# Altium PCB ESC.PcbDoc (part 3 of 3)
Units mm, origin at the board's own origin, x right, y up, seen from the top; angles counter-clockwise.
Board outline 60 x 40 mm, 4 copper layers (L1-SIGNAL/PWR, L2-GND, L3-PWR, L4-SIGNAL/PWR), stack 1.571 mm thick; 124 components, 80 nets, 417 pads, 463 vias.
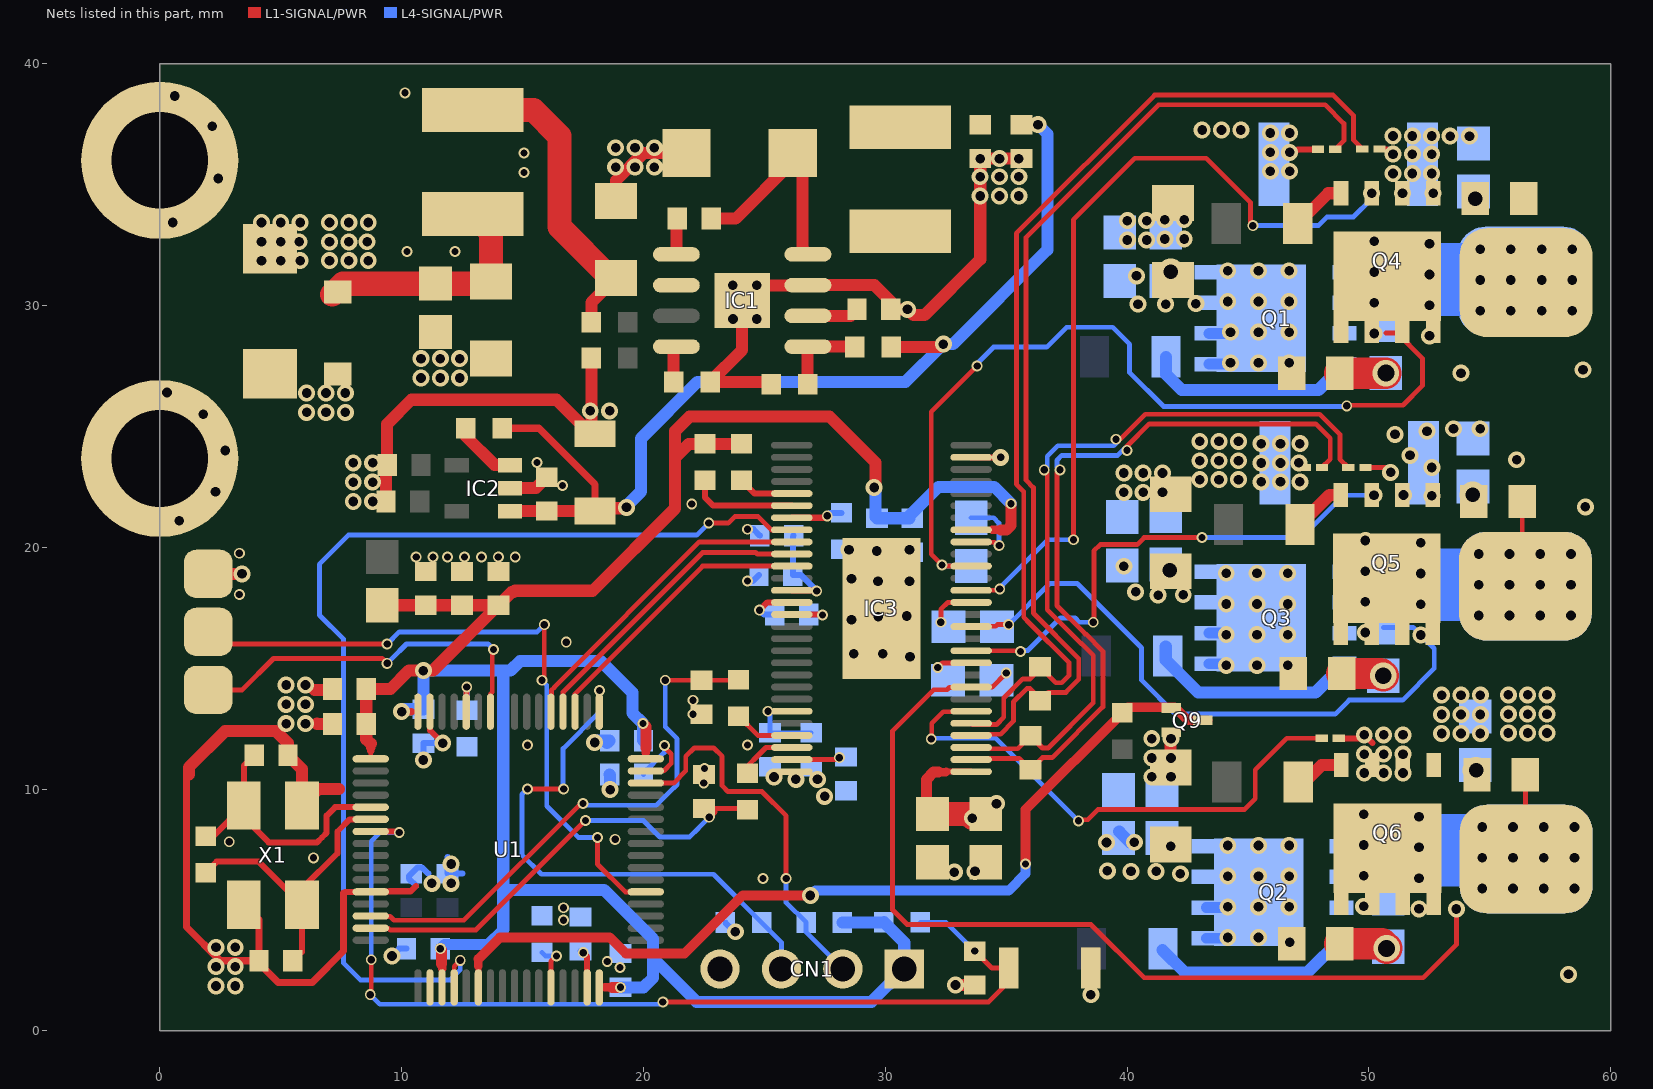
[diagram p4: the nets of this part, all layers, seen from the top]

## Via types
v1: diameter 0.7, hole 0.4, L1-SIGNAL/PWR to L4-SIGNAL/PWR, tented both sides, 336 vias
v2: diameter 0.45, hole 0.3, L1-SIGNAL/PWR to L4-SIGNAL/PWR, tented both sides, 118 vias
v3: diameter 1.1, hole 0.6, L1-SIGNAL/PWR to L4-SIGNAL/PWR, tented both sides, 5 vias
v4: diameter 1.1, hole 0.7, L1-SIGNAL/PWR to L4-SIGNAL/PWR, tented both sides, 3 vias
v5: diameter 0.7, hole 0.3, L1-SIGNAL/PWR to L4-SIGNAL/PWR, tented both sides, 1 vias

## Nets (pads, with @x,y where several pads share a name; then routed paths per layer and width w, separated by ;. In a path a pad name is that pad's centre, name@x,y a point inside that pad or via, vN(x,y) a via of type N, cw(c..) or ccw(c..) an arc to the next point about the centre after c; other vN are vias at no path point) (continued)
GND: -.1 C1.1 C2.1 C4.2 C5.1 C6.1 C7.1 C8.1 C9.1 C16.1 C19.1 C21.1 C22.1 C23.1 C24.1 C25.1 C26.1 C27.1 C30.1 C31.2 C32.1 C33.1 C34.1 C35.1 C36.1 C37.1 C38.1 C39.1 C40.1 C41.1 C42.1 C43.1 C44.1 C45.1 C46.1 C47.1 C48.1 C49.1 C50.1 C51.2 C52.1 C53.1 C54.1 C55.1 C56.1 C57.1 C58.2 CN1.4 D1.2 D2.1 D3.2 D4.2 IC1.7 IC1.9 IC2.2 IC3.28 IC3.55 IC3.57 J7.2 J10.2 J11.2 MOTOR_U4.1 Q6.1 Q6.2 Q6.3 Q9.2 R8.1 R11.2 R12.1 R20.1 R21.1 R28.2 R29.1 R31.1 R34.1 SW1.2 U1.12 U1.18 U1.63 X1.2 X1.4 | length 98.1
  L1-SIGNAL/PWR w0.25: 7.6,5.7 7.65,5.75 U1.12@8.722,5.75 8.731,5.76 9.482,5.76 9.497,5.775 10.375,5.775 10.6,6 ; U1.63@11.172,13.2 11.172,12.428 v1(11.7,11.9) ; IC3.55@33.549,23.72 v5(34.77,23.72) ; v1(38.5,1.5) SW1.2@38.5,2.6 ; v1@46.7,36.1 47.055,36.455 J10.2@47.894,36.455 ; J7.2@48.756,12.1 49.956,12.1 50.142,11.914
  L1-SIGNAL/PWR w0.3: 1.2,10.6 1.1,10.6 1.1,4.3 2.5,2.9 C58.2@4.1,2.9 ; X1.4@3.472,5.224 4.1,4.596 C58.2@4.1,2.9 ; 7.6,5.7 7.6,3.3 6.3,2 4.9,2 4.1,2.8 C58.2@4.1,2.9
  L1-SIGNAL/PWR w0.5: 1.2,10.6 1.2,10.9 2.7,12.4 4.8,12.4 5.3,11.9 C57.1@5.3,11.4 5.872,10.828 X1.2@5.872,9.324 6.548,10 7.4,10 ; MOTOR_U4.1@2,18.9 v1(3.4,18.9) ; 6.4,14.1 7.104,14.1 C42.1@7.138,14.134 ; 6.5,12.7 6.511,12.689 C43.1@7.142,12.689 ; C23.1@9.35,21.89 9.35,23.35 C24.1@9.4,23.4 9.4,25.1 10.4,26.1 16.4,26.1 17.8,24.7 17.842,24.742 R29.1@17.842,27.825 ; IC2.2@14.476,22.448 15.549,22.448 C22.1@16,22.9 ; C4.2@18.86,34.324 18.86,35.16 20.005,36.305 D1.2@21.779,36.305 ; v1(24.68,30.829) 24.08,30.229 24.08,28.156 R8.1@22.753,26.83 25.187,26.83 R11.2@25.277,26.74 ; IC1.9@24.704,30.829 26.789,30.829 IC1.7@26.8,30.84 29.55,30.84 30.23,30.16 C9.1@30.23,29.84 v1(30.92,29.84) 31.16,29.6 31.62,29.6 33.927,31.907 33.927,35.373 33.9,35.4 33.927,35.427 C7.1@33.927,36.077 C6.1@35.627,36.077 ; v1(32.9,1.9) C51.2@33.7,1.9 ; C52.1@41.8,10.893 v1@41.8,12.1
  L4-SIGNAL/PWR w0.25: v1(9.6,3.1) 9.9,3.4 C45.1@10.2,3.4 ; 10.6,6 10.3,6.3 10.3,6.4 10.65,6.75 10.85,6.75 11.1,6.5 ; v1(10.9,11.2) C47.1@10.9,11.9 v1(11.7,11.9) ; v1@11.9,7.2 C53.1@11.9,6.5 12.425,6.5 12.525,6.5 ; R34.1@23.387,4.479 23.765,4.1 v1(23.8,4.1) ; v2(24.3,18.6) 24.522,18.6 C41.1@24.78,18.857 ; v2(24.3,20.745) 24.549,20.745 C16.1@24.813,20.48
  L4-SIGNAL/PWR w0.5: v1(17.979,11.927) 18,11.948 18,12 C44.1@18.6,12 C44.1@18.5,11.9 ; C56.1@18.6,10.6 18.611,10.589 18.611,9.989 v1(18.621,9.979)
  other v1: 2.32,1.855 3.12,1.855 58.25,2.34 2.32,2.655 3.12,2.655 2.32,3.455 3.12,3.455 11.247,6.104 12.047,6.104 32.853,6.567 33.708,6.6 12.047,6.904 27.49,9.7 26.3,10.4 27.2,10.4 25.4,10.5 41.017,10.504 41.817,10.504 49.806,10.663 50.606,10.663 51.406,10.663 41.017,11.286 41.817,11.286 49.806,11.444 50.606,11.444 51.406,11.444 41.017,12.086 41.817,12.086 49.806,12.244 50.606,12.244 51.406,12.244 53.006,12.3 53.806,12.3 54.606,12.3 55.764,12.317 56.564,12.317 57.364,12.317 5.224,12.705 6.024,12.705 53.006,13.082 53.806,13.082 54.606,13.082 55.764,13.099 56.564,13.099 57.364,13.099 5.224,13.505 6.024,13.505 53.006,13.882 53.806,13.882 54.606,13.882 55.764,13.899 56.564,13.899 57.364,13.899 5.224,14.305 6.024,14.305 31.02,15.479 28.7,15.6 29.9,15.6 28.6,17 29.703,17.12 30.888,17.159 29.7,18.6 31,18.6 28.6,18.7 29.653,19.849 28.5,19.9 31,19.9 0.8,21.1 58.95,21.67 8,21.89 8.8,21.89 39.862,22.269 40.662,22.269 41.462,22.269 2.3,22.3 8,22.69 8.8,22.69 45.543,22.703 46.343,22.703 47.143,22.703 43.002,22.796 43.802,22.796 44.602,22.796 39.862,23.069 40.662,23.069 41.462,23.069 8,23.49 8.8,23.49 45.543,23.485 46.343,23.485 47.101,23.488 43.002,23.578 43.802,23.578 44.602,23.578 56.11,23.62 2.7,24 45.543,24.285 46.343,24.285 47.143,24.285 43.002,24.378 43.802,24.378 44.602,24.378 1.8,25.5 6.07,25.58 6.87,25.58 7.67,25.58 17.8,25.64 18.6,25.64 6.07,26.38 6.87,26.38 7.67,26.38 0.3,26.4 10.8,27 11.6,27 12.4,27 53.805,27.2 58.85,27.34 10.8,27.8 11.6,27.8 12.4,27.8 23.7,29.44 24.68,29.44 23.69,30.829 40.007,32.707 40.807,32.707 41.562,32.746 42.362,32.746 40.007,33.507 40.807,33.507 41.562,33.546 42.362,33.546 33.924,34.522 34.724,34.522 35.524,34.522 33.924,35.322 34.724,35.322 35.524,35.322 45.922,35.548 46.722,35.548 18.85,35.72 19.65,35.72 20.45,35.72 33.924,36.069 34.724,36.069 35.524,36.069 45.922,36.33 46.722,36.33 18.85,36.52 19.65,36.52 20.45,36.52 45.922,37.13 46.722,37.13 43.105,37.255 43.905,37.255 44.705,37.255
  other v2: 19.025,2.625 18.502,2.872 16.69,4.581 16.69,5.094 24.938,6.3 6.352,7.156 2.873,7.822 18.828,7.922 22.494,10.25 22.525,10.851 15.2,11.815 24.3,11.826 22.05,13.093 22.05,13.675 16.808,16.075 3.288,18.05 10.6,19.6 11.3,19.6 11.9,19.6 12.6,19.6 13.3,19.6 14,19.6 14.7,19.6 3.288,19.75 21.995,21.79 16.65,22.55 15.6,23.5 10.225,32.23 12.205,32.23 15.064,35.5 15.064,36.305 10.14,38.79
JTCK/SWCLK: CN1.3 R34.2 U1.49 | length 23.2
  L1-SIGNAL/PWR w0.2: v2(15.2,10) v2(16.7,10) ; U1.49@18.172,13.2 18.172,14.072 v2(18.177,14.075) v2(18.177,14.075) v2@18.177,14.077
  L4-SIGNAL/PWR w0.2: v2(15.2,10) 14.975,9.775 14.975,7.283 15.783,6.475 22.897,6.475 R34.2@24.893,4.479 25.704,3.668 CN1.3@25.704,2.561 ; v2@16.675,10 16.675,11.675 18.172,13.172 18.172,14.07 v2(18.177,14.075)
JTMS/SWDIO: CN1.2 R32.1 U1.46 | length 15.9
  L1-SIGNAL/PWR w0.2: U1.46@20.098,10.25 21.25,10.25 21.75,10.75 21.75,11.35 22.1,11.7 22.9,11.7 23.25,11.35 23.25,10.144 23.494,9.9 24.9,9.9 25.9,8.9 v2(25.9,6.3)
  L4-SIGNAL/PWR w0.2: v2(25.9,6.3) 25.9,5.308 R32.1@26.722,4.486 26.722,4.083 CN1.2@28.244,2.561
NetC3_1: C3.1 D1.1 IC1.8 L2.1 | length 9.2
  L1-SIGNAL/PWR w0.5: C3.1@22.8,33.59 23.81,33.59 26.18,35.96 D1.1@26.18,36.305 26.18,35.849 26.58,35.449 26.58,32.33 IC1.8@26.8,32.11
NetC3_2: C3.2 IC1.1 | length 1.5
  L1-SIGNAL/PWR w0.5: IC1.1@21.359,32.11 21.359,33.549 C3.2@21.4,33.59
NetC9_2: C9.2 IC1.6 | length 2.1
  L1-SIGNAL/PWR w0.5: IC1.6@26.8,29.57 28.56,29.57 C9.2@28.83,29.84
NetC10_2: C10.2 R1.1 | length 1.9
  L1-SIGNAL/PWR w1.3: R1.1@48.8,27.2 v4(50.7,27.2)
NetC11_2: C11.2 R2.1 | length 1.8
  L1-SIGNAL/PWR w1.3: R2.1@48.87,14.78 50.497,14.78 v4(50.591,14.685)
NetC12_2: C12.2 R3.1 | length 2
  L1-SIGNAL/PWR w1.3: R3.1@48.8,3.6 50.54,3.6 v4(50.73,3.41)
NetC13_1: C13.1 IC3.48 | length 3.4
  L1-SIGNAL/PWR w0.2: IC3.48@33.549,20.22 33.565,20.204 34.509,20.204 34.639,20.074 v2(34.707,20.074)
  L4-SIGNAL/PWR w0.2: C13.1@33.549,21.22 34.48,21.22 34.7,21 34.7,20.081 v2(34.707,20.074)
NetC14_1: C14.1 IC3.15 | length 1.8
  L1-SIGNAL/PWR w0.25: IC3.15@26.134,17.22 27.38,17.22 v2(27.4,17.2)
  L4-SIGNAL/PWR w0.25: C14.1@26.834,17.219 27.381,17.219 v2(27.4,17.2)
NetC14_2: C14.2 IC3.14 | length 2.2
  L1-SIGNAL/PWR w0.25: v2(24.8,17.4) 25.12,17.72 IC3.14@26.134,17.72
  L4-SIGNAL/PWR w0.25: v2(24.8,17.4) 24.981,17.219 C14.2@25.435,17.219
NetC15_1: C15.1 IC3.43 | length 1.9
  L1-SIGNAL/PWR w0.2: v2(32.297,16.901) 32.3,16.901 32.3,17.428 32.592,17.72 IC3.43@33.549,17.72
NetC16_2: C16.2 C41.2 IC3.13 | length 4
  L1-SIGNAL/PWR w0.25: IC3.13@26.134,18.22 26.98,18.22 27.015,18.185 27.044,18.185 27.098,18.131 v2(27.161,18.193)
  L4-SIGNAL/PWR w0.25: C16.2@26.213,20.48 26.179,20.447 C41.2@26.179,18.857 26.496,18.857 v2(27.161,18.193)
NetC17_2: C17.2 R16.1
  other v3: 54.401,34.419
NetC18_2: C18.2 R17.1
  other v3: 54.288,22.162
NetC19_2: C19.2 R18.1
  other v3: 54.429,10.775
NetC20_1: C20.1 IC3.38 | length 1.5
  L1-SIGNAL/PWR w0.2: v2(32.168,15.029) 32.358,15.22 IC3.38@33.549,15.22
NetC30_2: C30.2 C48.2 IC3.23 | length 3.6
  L1-SIGNAL/PWR w0.2: v2(25.154,13.22) IC3.23@26.134,13.22
  L4-SIGNAL/PWR w0.2: v2(25.154,13.22) 25.18,13.22 25.237,13.163 C30.2@25.237,12.33 C48.2@26.939,12.33
NetC31_1: C31.1 IC3.27 | length 2.1
  L1-SIGNAL/PWR w0.2: IC3.27@26.134,11.22 28.021,11.22 v2@28.192,11.39
  other v2: 28.1,11.3
NetC55_2: C55.2 U1.31 | length 1.6
  L1-SIGNAL/PWR w0.25: v2(17.511,3.235) 17.672,3.075 U1.31@17.672,1.8
  L4-SIGNAL/PWR w0.25: C55.2@17.4,3.314 17.433,3.314 v2(17.511,3.235)
NetC56_2: C56.2 U1.47 | length 3.6
  L1-SIGNAL/PWR w0.2: U1.47@20.098,10.75 20.117,10.769 20.854,10.769 21.148,11.064 21.148,11.45 20.865,11.733 20.886,11.754 20.886,11.793 20.88,11.8 v2(20.865,11.8)
  L4-SIGNAL/PWR w0.2: C56.2@20,10.6 20,10.65 20.865,11.516 20.865,11.733 20.865,11.772 20.879,11.786 v2(20.865,11.8)
NetIC1_4: IC1.4 R8.2 | length 1.5
  L1-SIGNAL/PWR w0.5: R8.2@21.247,26.83 21.247,28.188 IC1.4@21.359,28.3
NetIC1_5: IC1.5 R4.1 R11.1 | length 3.5
  L1-SIGNAL/PWR w0.5: R11.1@26.783,26.74 26.783,28.283 IC1.5@26.8,28.3 28.727,28.3 R4.1@28.747,28.28
NetIC2_3: IC2.3 R19.1 | length 2.6
  L1-SIGNAL/PWR w0.5: R19.1@12.657,24.92 12.657,24.586 13.845,23.398 IC2.3@14.476,23.398
NetIC3_5: IC3.5 R10.2 | length 2.3
  L1-SIGNAL/PWR w0.25: R10.2@24.049,22.766 24.596,22.22 IC3.5@26.134,22.22
NetIC3_6: IC3.6 R9.1 | length 4.4
  L1-SIGNAL/PWR w0.25: R9.1@22.549,22.766 22.549,22.051 22.88,21.72 IC3.6@26.134,21.72
NetIC3_7: IC3.7 R12.2 | length 2.1
  L1-SIGNAL/PWR w0.25: IC3.7@26.134,21.22 27.52,21.22 v2(27.6,21.3)
  L4-SIGNAL/PWR w0.25: v2(27.6,21.3) 27.725,21.425 R12.2@28.192,21.425
NetIC3_25: IC3.25 R22.1 | length 2.5
  L1-SIGNAL/PWR w0.2: R22.1@23.931,13.021 24.732,12.22 IC3.25@26.134,12.22
NetIC3_26: IC3.26 R23.1 | length 2.6
  L1-SIGNAL/PWR w0.2: R23.1@24,10.653 25.066,11.72 IC3.26@26.134,11.72
NetQ1_4: Q1.4 R5.2 | length 8.8
  L4-SIGNAL/PWR w0.5: R5.2@41.609,27.876 41.609,27.151 42.26,26.5 47.912,26.5 Q1.4@48.983,27.571
NetQ2_4: Q2.4 R7.2 | length 8.4
  L4-SIGNAL/PWR w0.5: R7.2@41.458,3.342 42.38,2.42 47.46,2.42 Q2.4@48.87,3.83
NetQ3_4: Q3.4 R6.2 | length 9
  L4-SIGNAL/PWR w0.5: R6.2@41.596,15.9 41.596,15.336 42.582,14.35 42.942,13.99 47.793,13.99 Q3.4@48.984,15.181
NetQ4_4: Q4.4 R13.2 | length 2.3
  L1-SIGNAL/PWR w0.5: R13.2@47.058,33.381 48.315,34.638 Q4.4@48.844,34.638
NetQ5_4: Q5.4 R14.2 | length 2.2
  L1-SIGNAL/PWR w0.5: R14.2@47.147,20.938 48.369,22.16 Q5.4@48.838,22.16
NetQ6_4: Q6.4 R15.2 | length 2.1
  L1-SIGNAL/PWR w0.5: R15.2@47.079,10.3 47.352,10.3 48.042,10.99 Q6.4@48.864,10.99
NetR28_1: R28.1 U1.28 | length 2.1
  L1-SIGNAL/PWR w0.2: U1.28@16.172,1.8 16.172,2.872 v2(16.4,3.1)
  L4-SIGNAL/PWR w0.2: R28.1@15.8,3.247 15.947,3.1 v2(16.4,3.1)
NetR31_2: R31.2 U1.60 | length 2
  L1-SIGNAL/PWR w0.25: U1.60@12.672,13.2 12.681,13.21 12.681,14.215 v2(12.691,14.225)
  L4-SIGNAL/PWR w0.25: v2(12.691,14.225) 12.691,13.262 R31.2@12.7,13.253
nSCS: IC3.8 U1.20 | length 44.4
  L1-SIGNAL/PWR w0.2: U1.20@12.172,1.8 12.172,2.667 v2(12.424,2.919) ; v2(22.7,21) 23.508,21 23.777,21.27 24.74,21.27 25.29,20.72 IC3.8@26.134,20.72
  L4-SIGNAL/PWR w0.2: v2(12.424,2.919) 12.424,2.524 12,2.1 8.3,2.1 7.6,2.8 7.6,16.2 6.6,17.2 6.6,19.3 7.8,20.5 22.2,20.5 v2(22.7,21)
OSC_IN: C57.2 R30.2 U1.5 X1.3 | length 11.5
  L1-SIGNAL/PWR w0.25: R30.2@1.9,8.053 2.202,8.053 X1.3@3.472,9.324 ; C57.2@3.9,11.4 3.472,10.972 X1.3@3.472,9.324 ; U1.5@8.722,9.25 7.25,9.25 6.897,8.897 6.897,8.189 6.707,7.999 6.508,7.8 4.5,7.8 3.472,8.828 X1.3@3.472,9.324
OSC_OUT: C58.1 R30.1 U1.6 X1.1 | length 12.6
  L1-SIGNAL/PWR w0.25: R30.1@1.9,6.547 2.353,7 4.096,7 X1.1@5.872,5.224 ; C58.1@5.5,2.9 5.872,3.272 X1.1@5.872,5.224 ; U1.6@8.722,8.75 7.85,8.75 7.347,8.247 7.347,7.347 5.872,5.872 X1.1@5.872,5.224
POWER_BUCK: C4.1 IC1.2 L1.2 R26.2 | length 13.3
  L1-SIGNAL/PWR w0.5: R26.2@17.842,29.305 17.842,30.122 C4.1@18.86,31.139
  L1-SIGNAL/PWR w1: L1.2@12.936,38.081 15.449,38.081 16.53,37 16.53,33.25 18.641,31.139 C4.1@18.86,31.139
POWER_IN: +.1 C5.2 C8.2 C21.2 C34.2 C35.2 C36.2 C37.2 C38.2 C39.2 C40.2 C49.2 C50.2 C52.2 D2.2 D3.1 IC3.29 L1.1 Q1.5 Q1.6 Q1.7 Q1.8 Q1.9 Q2.5 Q2.6 Q2.7 Q2.8 Q2.9 Q3.5 Q3.6 Q3.7 Q3.8 Q3.9 R1.2 R2.2 R3.2 | length 21.9
  L1-SIGNAL/PWR w0.25: 32.52,10.72 IC3.29@33.549,10.72
  L1-SIGNAL/PWR w0.35: 32.2,10.7 32.5,10.7 32.52,10.72
  L1-SIGNAL/PWR w0.45: C35.2@31.95,8.975 31.7,9.225 31.7,10.4 32,10.7 32.2,10.7
  L1-SIGNAL/PWR w1: D3.1@7.13,30.45 7.58,30.9 C5.2@11.4,30.9 13.612,30.9 C8.2@13.7,30.988 13.7,33.017 L1.1@12.936,33.781 ; C35.2@31.95,8.975 33.425,8.975 v1(33.6,8.8) ; C34.2@33.8,8.8 33.975,8.975 C34.2@34.15,8.975
  L4-SIGNAL/PWR w0.45: C37.2@41.478,7.97 v1(41.806,7.642) ; Q2.5@43.27,3.83 44.13,3.83 v1(44.16,3.86) ; Q2.6@43.27,5.1 44.13,5.1 v1(44.16,5.13) ; Q1.5@43.383,27.571 44.222,27.571 v1(44.274,27.624) ; Q1.6@43.383,28.841 44.222,28.841 v1(44.274,28.894) ; Q3.5@43.384,15.181 44.033,15.181 v1(44.099,15.115) ; Q3.6@43.384,16.451 44.033,16.451 v1(44.099,16.385)
  L4-SIGNAL/PWR w0.5: C38.2@39.674,8.241 40.115,7.8 v1(40.3,7.8)
  other v1: 46.722,3.672 45.43,3.86 45.43,5.13 46.7,5.13 44.16,6.4 45.43,6.4 46.7,6.4 42.2,6.5 40.159,6.6 41.2,6.6 39.18,6.62 44.16,7.67 45.43,7.67 46.7,7.67 39.15,7.788 34.6,9.4 45.369,15.115 46.639,15.115 45.369,16.385 46.639,16.385 44.099,17.655 45.369,17.655 46.639,17.655 41.283,18.022 42.321,18.035 40.353,18.156 44.099,18.925 45.369,18.925 46.639,18.925 39.864,19.215 45.432,27.624 46.702,27.624 45.432,28.894 46.702,28.894 40.451,30.053 41.596,30.053 42.84,30.075 44.162,30.164 45.432,30.164 46.702,30.164 40.385,31.222 44.162,31.434 45.432,31.434 46.702,31.434 4.202,31.85 5.002,31.85 5.802,31.85 7.018,31.85 7.818,31.85 8.618,31.85 4.202,32.631 5.002,32.631 5.76,32.635 7.018,32.631 7.818,32.631 8.576,32.635 0.54,33.43 4.202,33.431 5.002,33.431 5.802,33.431 7.018,33.431 7.818,33.431 8.618,33.431 2.41,35.25 2.17,37.41 0.62,38.66
  other v3: 41.764,19.046 41.8,31.4
PWM/DSHOT: MOTOR_U3.1 U1.37 | length 28.3
  L1-SIGNAL/PWR w0.2: MOTOR_U3.1@2,16.5 2.5,16 v2(9.4,16) ; v2(15.8,14.5) 15.9,14.6 v2(15.9,16.8) ; v2(18.1,8) 18.1,6.9 19.25,5.75 U1.37@20.098,5.75
  L4-SIGNAL/PWR w0.2: v2(9.4,16) 9.9,16.5 15.6,16.5 v2(15.9,16.8) ; v2(15.8,14.5) 16,14.3 16,9.3 17.3,8 17.6,8 v2(18.1,8)
RESET: C51.1 R27.1 SW1.1 U1.7 | length 40.8
  L1-SIGNAL/PWR w0.2: v2(8.7,1.5) 8.741,1.541 v2(8.741,2.941) ; v2(20.8,1.2) 33.7,1.2 34.274,1.2 35.1,2.026 SW1.1@35.1,2.6 34.4,2.6 v2(33.7,3.3)
  L1-SIGNAL/PWR w0.25: U1.7@8.722,8.25 9.85,8.25 v2(9.9,8.2)
  L4-SIGNAL/PWR w0.2: v2(8.7,1.5) 9.1,1.1 20.7,1.1 v2(20.8,1.2) ; v2(8.741,2.941) 8.741,7.841 9.1,8.2 v2(9.9,8.2) ; R27.1@31.452,4.493 32.507,4.493 v2(33.7,3.3)
S1_N: C28.2 IC3.33 J8.1 | length 43.4
  L1-SIGNAL/PWR w0.2: IC3.33@33.549,12.72 33.599,12.67 34.6,12.67 34.9,12.97 34.9,13.766 35.689,14.555 35.989,14.555 36.4,14.966 C28.2@36.4,15.055 37.055,14.4 37.3,14.4 37.6,14.7 37.6,15.23 35.962,16.869 35.725,17.105 35.725,22.3 35.42,22.605 35.42,32.986 41.134,38.7 48.519,38.7 49.367,37.852 49.367,36.832 J8.1@49.729,36.47
S1_P: C28.1 IC3.32 J10.1 | length 42.5
  L1-SIGNAL/PWR w0.2: IC3.32@33.549,12.22 33.599,12.27 34.766,12.27 35.3,12.804 35.3,13.6 35.855,14.155 35.989,14.155 36.4,13.744 C28.1@36.4,13.655 36.745,14 37.466,14 38,14.534 38,15.396 36.127,17.269 36.125,17.271 36.125,22.466 35.82,22.771 35.82,32.82 41.3,38.3 48.187,38.3 48.967,37.52 48.967,36.817 J10.1@48.605,36.455
S2_N: C29.2 IC3.31 J9.1 | length 32.2
  L1-SIGNAL/PWR w0.2: IC3.31@33.549,11.72 33.599,11.67 35.47,11.67 C29.2@36,12.2 36.5,11.7 36.734,11.7 38.6,13.566 38.6,15.534 38.117,16.017 38.096,16.017 36.7,17.413 36.7,23.075 v2(36.575,23.2) ; v2(39.537,24.466) 39.713,24.466 40.747,25.5 47.966,25.5 48.8,24.666 48.8,23.644 J9.1@49.144,23.3
  L4-SIGNAL/PWR w0.2: v2(36.575,23.2) 36.7,23.325 36.7,23.766 37.134,24.2 39.447,24.2 39.625,24.378 v2(39.537,24.466)
S2_P: C29.1 IC3.30 J11.1 | length 31.5
  L1-SIGNAL/PWR w0.2: IC3.30@33.549,11.22 33.599,11.27 35.531,11.27 C29.1@36,10.8 36.5,11.3 36.9,11.3 39,13.4 39,15.7 38.283,16.417 38.262,16.417 37.1,17.579 37.1,23.075 v2(37.225,23.2) ; v2(39.996,24.007) 39.996,24.184 40.913,25.1 47.8,25.1 48.4,24.5 48.4,23.644 J11.1@48.056,23.3
  L4-SIGNAL/PWR w0.2: v2(37.225,23.2) 37.1,23.325 37.1,23.6 37.3,23.8 39.613,23.8 39.908,24.095 v2(39.996,24.007)
SCLK: IC3.11 U1.51 | length 11.9
  L1-SIGNAL/PWR w0.2: U1.51@17.172,13.2 17.172,13.945 22.446,19.22 24.643,19.22 IC3.11@26.134,19.22
SDI: IC3.9 U1.53 | length 13.4
  L1-SIGNAL/PWR w0.2: U1.53@16.172,13.2 16.191,13.219 16.191,14.085 16.325,14.219 16.325,14.23 22.315,20.22 24.562,20.22 IC3.9@26.134,20.22
SDO: IC3.10 U1.52 | length 12.7
  L1-SIGNAL/PWR w0.2: U1.52@16.672,13.2 16.672,14.011 22.443,19.782 24.646,19.782 24.708,19.72 IC3.10@26.134,19.72
SH_A: C10.1 C13.2 IC3.46 MOTOR_U1.1 pad.1@56.435,31.007 Q1.1 Q1.2 Q1.3 Q4.5 Q4.6 Q4.7 Q4.8 Q4.9 R16.2 | length 42.5
  L1-SIGNAL/PWR w0.2: IC3.46@33.549,19.22 32.39,19.22 31.9,19.71 31.9,25.6 v2(33.8,27.5) ; v2(49.08,25.848) 49.106,25.875 51.408,25.875 52.213,26.68 52.213,27.811 51.164,28.86 50.7,28.86
  L4-SIGNAL/PWR w0.2: v2(32.342,19.268) 32.39,19.22 C13.2@33.549,19.22 ; v2(33.8,27.5) 33.8,27.6 34.476,28.276 36.676,28.276 37.5,29.1 39.4,29.1 40.105,28.395 40.105,27.225 41.504,25.825 v2@49.075,25.825 ; 47.849,25.825 v2@49.075,25.825 ; v2@49.1,25.8 v2@49.075,25.825
  L4-SIGNAL/PWR w3: 51.492,31.072 56.37,31.072 pad.1@56.435,31.007
  other v1: 52.505,28.742 50.214,28.842 54.6,29.784 55.87,29.784 57.14,29.784 58.41,29.784 52.505,30.012 50.214,30.112 54.6,31.054 55.87,31.054 57.14,31.054 58.41,31.054 52.505,31.282 50.214,31.382 54.6,32.324 55.87,32.324 57.14,32.324 58.41,32.324 52.505,32.552 50.214,32.652
SH_B: C11.1 C15.2 IC3.41 MOTOR_V1.1 pad.1@56.468,18.391 Q3.1 Q3.2 Q3.3 Q5.5 Q5.6 Q5.7 Q5.8 Q5.9 R17.2 | length 34.3
  L1-SIGNAL/PWR w0.2: IC3.41@33.549,16.72 33.565,16.735 34.567,16.735 34.632,16.8 v2(35.1,16.8) ; v1(55.813,19.721) 56.341,20.249 R17.2@56.341,21.895
  L4-SIGNAL/PWR w0.2: v2(35.1,16.8) 36.8,18.5 37.934,18.5 40.6,15.834 40.6,14.5 42,13.1 48.6,13.1 49.18,13.68 51.391,13.68 52.7,14.99 52.7,15.813 51.828,16.685 C11.1@50.591,16.685
  L4-SIGNAL/PWR w3: 51.695,18.459 pad.1@56.573,18.459
  other v1: 52.141,16.372 49.85,16.472 54.543,17.181 55.813,17.181 57.083,17.181 58.353,17.181 52.141,17.642 49.85,17.742 54.543,18.451 55.813,18.451 57.083,18.451 58.353,18.451 52.141,18.912 49.85,19.012 54.543,19.721 57.083,19.721 58.353,19.721 52.141,20.182 49.85,20.282
SH_C: C12.1 C20.2 IC3.36 MOTOR_W1.1 pad.1@56.499,7.11 Q2.1 Q2.2 Q2.3 Q6.5 Q6.6 Q6.7 Q6.8 Q6.9 R18.2 | length 46.9
  L1-SIGNAL/PWR w0.2: v2(35,14.8) 34.42,14.22 IC3.36@33.549,14.22 33.534,14.204 32.651,14.204 32.551,14.104 31.997,14.104 30.3,12.408 30.3,5 30.9,4.4 38.5,4.4 40.7,2.2 52.248,2.2 53.615,3.566 v1(53.615,5.044) ; v1(55.958,8.432) 56.467,8.941 R18.2@56.467,10.589
  L4-SIGNAL/PWR w3: v1@51.808,7.472 pad.1@56.686,7.472
  other v1: 52.072,5.048 49.78,5.148 54.688,5.892 55.958,5.892 57.228,5.892 58.498,5.892 52.072,6.318 49.78,6.418 54.688,7.162 55.958,7.162 57.228,7.162 58.498,7.162 52.072,7.588 49.78,7.688 54.688,8.432 57.228,8.432 58.498,8.432 52.072,8.858 49.78,8.958
SL_A: C17.1 IC3.44 J8.2 Q4.1 Q4.2 Q4.3 R20.2 | length 34.8
  L1-SIGNAL/PWR w0.2: IC3.44@33.549,18.22 34.734,18.22 v2(34.734,18.272) ; v2(37.78,20.313) 37.78,33.546 40.324,36.09 43.27,36.09 45.1,34.26 45.1,33.4 v2(45.2,33.3) ; J8.2@50.44,36.47 50.781,36.47 v1(50.995,36.256)
  L4-SIGNAL/PWR w0.2: v2(34.734,18.272) 34.833,18.272 34.833,18.433 36.713,20.313 v2(37.78,20.313) ; v2(45.2,33.3) 47.911,33.3 48.271,33.66 49.36,33.66 50.114,34.414 v1(50.114,34.638)
  other v1: 51.384,34.638 52.654,34.638 50.995,35.456 51.795,35.456 52.595,35.456 51.795,36.256 52.595,36.256 50.995,37.003 51.795,37.003 52.595,37.003 53.36,37 54.16,37
SL_B: C18.1 IC3.39 J9.2 Q5.1 Q5.2 Q5.3 R21.2 | length 22.3
  L1-SIGNAL/PWR w0.2: IC3.39@33.549,15.72 35.562,15.72 v2(35.594,15.688) ; v2(38.6,16.9) 38.625,16.925 38.625,19.849 38.888,20.113 40.413,20.113 40.7,20.4 v2(43.1,20.4) ; J9.2@49.856,23.3 50.7,23.3 v1(50.9,23.1)
  L4-SIGNAL/PWR w0.2: v2(35.594,15.688) 35.642,15.735 35.902,15.735 37.241,17.075 37.854,17.075 38.029,16.9 v2(38.6,16.9) ; v2(43.1,20.4) 47.2,20.4 48.953,22.153 v1(50.209,22.153)
  other v1: 52.602,22.123 51.427,22.16 52.6,23.3 51.7,23.8 51.075,24.671 52.4,24.8 53.5,24.9 54.6,24.9
SL_C: IC3.34 J7.1 | length 22.2
  L1-SIGNAL/PWR w0.2: v2(31.9,12.075) 31.922,12.097 31.922,12.722 32.4,13.2 33.53,13.2 IC3.34@33.549,13.22 ; v2(37.986,8.686) 38.034,8.734 38.376,8.734 38.792,9.149 44.849,9.149 44.9,9.2 ; 44.9,9.2 45.3,9.6 45.3,10.8 46.6,12.1 J7.1@48.044,12.1
  L4-SIGNAL/PWR w0.2: v2(31.9,12.075) 31.925,12.1 34.572,12.1 37.672,9 v2(37.986,8.686)
SO1: C32.2 R22.2 U1.14 | length 22.7
  L1-SIGNAL/PWR w0.2: U1.14@8.722,4.75 8.741,4.731 9.527,4.731 9.683,4.575 12.575,4.575 17.4,9.4 v2(17.5,9.4) ; v2(20.9,14.5) 23.903,14.5 R22.2@23.931,14.527
  L4-SIGNAL/PWR w0.2: v2(17.5,9.4) 17.571,9.329 20.529,9.329 21.066,9.866 21.39,10.19 21.39,12.081 20.9,12.572 v2(20.9,14.5)
SO2: C33.2 R23.2 U1.15 | length 18.5
  L1-SIGNAL/PWR w0.2: U1.15@8.722,4.25 8.741,4.231 9.461,4.231 9.492,4.2 9.508,4.2 9.533,4.175 13.075,4.175 v2(17.6,8.7) ; C33.2@22.5,9.2 23,9.2 23.947,9.2 R23.2@24,9.147 ; v2(22.717,8.837) 22.75,8.837 22.963,9.05 22.963,9.2
  L4-SIGNAL/PWR w0.2: v2(17.6,8.7) 19.997,8.7 20.685,8.012 21.901,8.012 22.28,8.39 22.28,8.395 22.717,8.832 v2(22.717,8.837)
TEMP: Q9.1 Q9.3 R33.1 U1.22 | length 38
  L1-SIGNAL/PWR w0.25: U1.22@13.172,1.8 13.172,2.672
  L1-SIGNAL/PWR w0.35: 13.172,2.672 13.172,2.972
  L1-SIGNAL/PWR w0.4: 13.172,2.972 14.06,3.86 16.619,3.86 18.61,3.86 19.27,3.2 21.7,3.2 24.1,5.6 v1(26.9,5.6) ; v2(35.8,6.9) 35.8,9.153 R33.1@39.8,13.153 40.035,13.388 41.938,13.388 41.962,13.388 42.5,12.85 Q9.3@43.341,12.85
  L4-SIGNAL/PWR w0.4: v1(26.9,5.6) 27.109,5.809 35.109,5.809 35.8,6.5 v2(35.8,6.9)
TX: MOTOR_U2.1 U1.58 | length 15.5
  L1-SIGNAL/PWR w0.2: MOTOR_U2.1@2,14.1 3.4,14.1 4.7,15.4 9.2,15.4 v2(9.4,15.2) ; U1.58@13.672,13.2 13.672,13.923 13.75,14.001 13.75,15.725 v2(13.8,15.775)
  L4-SIGNAL/PWR w0.2: v2(9.4,15.2) 9.583,15.383 10.2,16 13.575,16 v2(13.8,15.775)
V_5V: C6.2 C7.2 C22.2 D4.1 IC2.1 L2.2 R4.2 R19.2 | length 42
  L1-SIGNAL/PWR w0.3: R19.2@14.163,24.92 15.68,24.92 18,22.6 D4.1@18,21.5
  L1-SIGNAL/PWR w0.5: IC2.1@14.476,21.498 D4.1@18,21.5 ; D4.1@18.113,21.612 19.262,21.612 v1(19.3,21.65) ; R4.2@30.253,28.28 32.28,28.28 v1(32.4,28.4) ; C6.2@35.627,37.477 v1(36.317,37.477)
  L4-SIGNAL/PWR w0.5: v1(19.3,21.65) 19.3,21.704 19.9,22.304 19.9,24.5 22.23,26.83 30.83,26.83 v1(32.4,28.4) 32.8,28.4 36.7,32.3 36.7,37.095 v1(36.317,37.477)
VDD_SPI: C1.2 C2.2 C25.2 C26.2 C27.2 C42.2 C43.2 C44.2 C45.2 C46.2 C47.2 CN1.1 IC3.49 L3.2 R9.2 R10.1 R27.2 R32.2 U1.1 U1.19 U1.32 U1.48 U1.64 | length 108.8
  L1-SIGNAL/PWR w0.2: U1.1@8.722,11.25 8.722,11.578 ; 10.403,13.2 U1.64@10.672,13.2
  L1-SIGNAL/PWR w0.25: U1.19@11.672,1.8 11.672,2.572 ; U1.32@18.172,1.8 18.4,1.8 ; U1.48@20.098,11.25 20.1,11.252 20.1,11.5 ; IC3.49@33.549,20.72 34.42,20.72
  L1-SIGNAL/PWR w0.3: 8.722,11.578 8.722,11.722 ; v1@10.2,13.2 10.403,13.2
  L1-SIGNAL/PWR w0.35: 11.647,2.772 11.672,2.747 11.672,2.572 ; 18.4,1.8 18.7,1.8 ; 20.1,11.5 20.1,11.7 ; 34.42,20.72 34.78,20.72
  L1-SIGNAL/PWR w0.4: 8.722,11.722 8.722,11.878 ; v1(10,13.2) v1@10.2,13.2
  L1-SIGNAL/PWR w0.45: v2(11.6,3.4) 11.647,3.353 11.647,2.772 ; 18.7,1.8 v2(19.048,1.8) ; v2(19.98,12.71) 20.1,12.59 20.1,11.7 ; 34.78,20.72 35.02,20.72 35.2,20.9 v2(35.2,21.8)
  L1-SIGNAL/PWR w0.5: 8.722,11.878 8.538,12.062 C42.2@8.538,14.134 9.534,14.134 10.3,14.9 v1(10.9,14.9) 11.3,14.9 C25.2@14,17.6 ; L3.2@9.2,17.6 C25.2@14,17.6 ; R10.1@24.049,24.273 R9.2@22.549,24.273 21.873,24.273 21.3,23.7 ; v1(29.541,22.47) 29.6,22.529 29.6,23.5 27.7,25.4 21.9,25.4 21.3,24.8 21.3,23.7 ; C25.2@14,17.6 14.55,18.15 14.636,18.15 14.686,18.2 17.9,18.2 21.3,21.6 21.3,23.7
  L4-SIGNAL/PWR w0.45: v2(11.6,3.4) 11.768,3.569 13.569,3.569 14.2,4.2
  L4-SIGNAL/PWR w0.5: v1(10,13.2) 10.1,13.3 C47.2@10.9,13.3 v1(10.9,14.9) 14.2,14.9 ; 14.2,4.2 14.2,5.8 ; v2(19.048,1.8) 20,1.8 20.4,2.2 20.4,3 ; C44.2@20,12 19.98,12.02 v2(19.98,12.71) 19.541,13.149 19.541,13.993 18.234,15.3 14.9,15.3 14.5,14.9 14.2,14.9 ; R32.2@28.229,4.486 29.939,4.486 R27.2@29.946,4.493 30.784,3.654 CN1.1@30.784,2.561 29.423,1.2 22.2,1.2 20.4,3 ; v1(29.541,22.47) 29.593,22.417 29.593,21.26 C1.2@29.653,21.2 31,21.2 31,21.3 32.2,22.5 34.5,22.5 v2(35.2,21.8) ; 14.2,5.8 14.225,5.825 18.375,5.825 20.4,3.8 20.4,3 ; 14.2,5.8 14.2,14.9
pads on no net: IC2.4 IC3.1 IC3.2 IC3.3 IC3.4 IC3.50 IC3.51 IC3.52 IC3.53 IC3.54 IC3.56 U1.2 U1.3 U1.4 U1.8 U1.9 U1.16 U1.17 U1.21 U1.23 U1.24 U1.25 U1.26 U1.27 U1.29 U1.30 U1.33 U1.38 U1.39 U1.40 U1.44 U1.45 U1.50 U1.54 U1.55 U1.56 U1.57 U1.59 U1.61 U1.62

## Polygon pours and split planes (outlines as drawn)
GND on L1-SIGNAL/PWR "NONET_L-01_P-001" (solid, pour order 5): 0,40 60,40 60,0 0,0
NetC3_1 on L1-SIGNAL/PWR "NONET_L-01_P-001" (solid, pour order 3): 25.9,31.81 25.9,32.42 28.19,32.42 28.19,33.61 32.4,33.61 32.4,31.81
POWER_IN on L3-PWR "NONET_L-01_P-001" (solid, pour order 4): 0,40 60,40 60,0 0,0
GND on L2-GND "NONET_L-01_P-001" (solid, pour order 7): 0,40 60,40 60,0 0,0
GND on L4-SIGNAL/PWR "NONET_L-01_P-001" (solid, pour order 6): 0,40 60,40 60,0 0,0

## Keep-outs
Keep-Out Layer:
  the board outline again, w0.8

## Other copper
L1-SIGNAL/PWR:
  region net SL_A: 49.81,34.12 49.82,34.11 52.96,34.11 52.96,37.57 52.95,37.58 50.929,37.58 50.618,37.268 50.618,35.958 49.81,35.15
  pour cut-out: 46.967,19.865 46.989,19.887 47.951,19.887 47.94,19.877 47.94,15.996 47.913,15.969 47.561,15.969 47.453,16.077 47.453,16.139 47.206,16.385 47.206,19.478 46.967,19.717
  pour cut-out: 48.02,28.45 48.02,32.302 47.107,32.302 47.03,32.226 47.269,31.987 47.269,28.681 47.562,28.389 47.959,28.389
  pour cut-out: 45.912,10.547 46.118,10.753 46.21,10.753 46.275,10.688 46.275,9.249 47.794,9.249 47.94,9.103 47.94,4.863 47.866,4.789 47.664,4.789 47.534,4.919 47.534,4.959 47.267,5.225 47.267,8.223 46.97,8.52 45.318,8.52 45.318,8.819 45.912,9.412
  pour cut-out: 51.535,2.812 51.313,3.034 51.313,4.28 53.003,4.28 53.003,3.82 51.995,2.812
  pour cut-out: 36.126,23.625 37.168,23.625 37.168,33.495 37.048,33.615 36.126,32.693
  pour cut-out: 20.952,6 20.952,7.218 21.545,7.81 23.037,7.81 23.037,7.57 21.216,5.748 20.964,6
  region net SH_C: 48.45,4.79 48.45,9.35 55.49,9.35 55.868,9.728 55.868,11.302 57.04,11.302 57.04,11.05 59,9.09 59,4.79
  region net SH_B: 48.47,16 48.47,20.56 55.51,20.56 55.77,20.82 55.77,22.61 56.909,22.61 56.909,22.411 59.02,20.3 59.02,16
  region net SH_A: 48.53,28.45 48.53,33.06 55.57,33.06 55.83,33.32 55.83,35.11 56.969,35.11 56.969,34.911 59.08,32.8 59.08,28.45
  region net GND: 49.8,10.48 49.8,13.4 52.3,13.4 53.4,14.5 55.39,14.5 55.39,12.489 53.879,12.489 52.98,11.59 52.98,10.48
  region net SL_B: 49.824,21.642 49.834,21.632 52.974,21.632 52.974,25.275 51.116,25.275 50.632,24.791 50.632,23.48 49.824,22.672
  region net SL_A: 55,35.99 52.96,35.99 52.95,36 52.95,37.58 55,37.58
  region net SL_B: 55.01,23.798 52.96,23.798 52.96,25.28 55.01,25.28
  region net V_5V: 28.53,36.497 28.53,38.235 36.08,38.235 36.08,37.07 32.81,37.07 32.43,36.69 32.43,36.497
  region net POWER_BUCK: 22.32,30.53 22.32,31.129 22.31,31.139 20.15,31.139 19.727,31.561 19.727,31.897 17.984,31.897 17.984,30.53
  region net POWER_IN: 0,29.77 9.4,29.77 9.4,39.99 9.39,40 0,40
L4-SIGNAL/PWR:
  region net SH_C: 48.45,4.79 48.45,9.35 55.49,9.35 55.868,9.728 55.868,11.302 57.04,11.302 57.04,11.05 59,9.09 59,4.79
  region net SH_B: 48.47,16 48.47,20.56 55.51,20.56 55.77,20.82 55.77,22.61 56.909,22.61 56.909,22.411 59.02,20.3 59.02,16
  region net SH_A: 48.53,28.45 48.53,33.06 55.57,33.06 55.83,33.32 55.83,35.11 56.969,35.11 56.969,34.911 59.08,32.8 59.08,28.45
  region net POWER_IN: 38.8,8.1 38.8,6.1 43.6,6.1 43.6,8.1
  region net POWER_IN: 39,31.6 39,29.7 43.7,29.7 43.7,31.6
  region net GND: 43,34.1 43,37.8 47.1,37.8 47.1,34.1
  region net GND: 47.1,37.8 48.2,37.8 48.2,35.4 47.1,35.4
  region net SL_A: 49.81,34.12 49.82,34.11 52.96,34.11 52.96,37.57 52.95,37.58 50.929,37.58 50.618,37.268 50.618,35.958 49.81,35.15
  region net SL_A: 55,35.99 52.96,35.99 52.95,36 52.95,37.58 55,37.58
  region net SL_B: 55.01,23.804 52.96,23.804 52.96,25.28 55.01,25.28
  region net POWER_IN: 39.1,19.6 39.1,18.799 40.226,17.674 43.742,17.674 43.742,19.605 39.124,19.605
  region net GND: 47.6,21.8 47.6,25.225 42.8,25.225 42.8,21.8
  region net SL_B: 49.819,21.647 49.829,21.637 52.969,21.637 52.969,25.28 51.111,25.28 50.627,24.796 50.627,23.485 49.819,22.677
  region net POWER_IN: 0,29.77 9.4,29.77 9.4,39.99 9.39,40 0,40

## Silkscreen, mask and mechanical layers (free items; w line width, h text height)
Top Overlay:
  text "+" at 3.776,34.972 h1
  text "U" at 56.104,27.234 h1
  text "-" at 3.729,23.244 h1
  text "GND" at 4.074,18.284 h1
  text "DSHOT" at 3.524,16.004 h1
  text "V" at 56.104,14.564 h1
  text "TX" at 3.534,13.564 h1
  text "3V3" at 30.646,4.254 h0.8 r90
  text "GND" at 23.466,4.174 h1 r90
  text "SWCLK" at 26.336,4.134 h1 r90
  text "SWDIO" at 28.776,4.094 h1 r90
  text "W" at 56.104,3.314 h1
Top Mechanical 2/Mechanical 3:
  region: 39,31.197 39,29.7 43.7,29.7 43.7,31.1 39.097,31.1

## Dimensions
0,40 to 60,40 on Mechanical 10